# EAGLE board LilyPad-Simblee-Panel-v12 (EAGLE 7.5.0), part 1 of 2
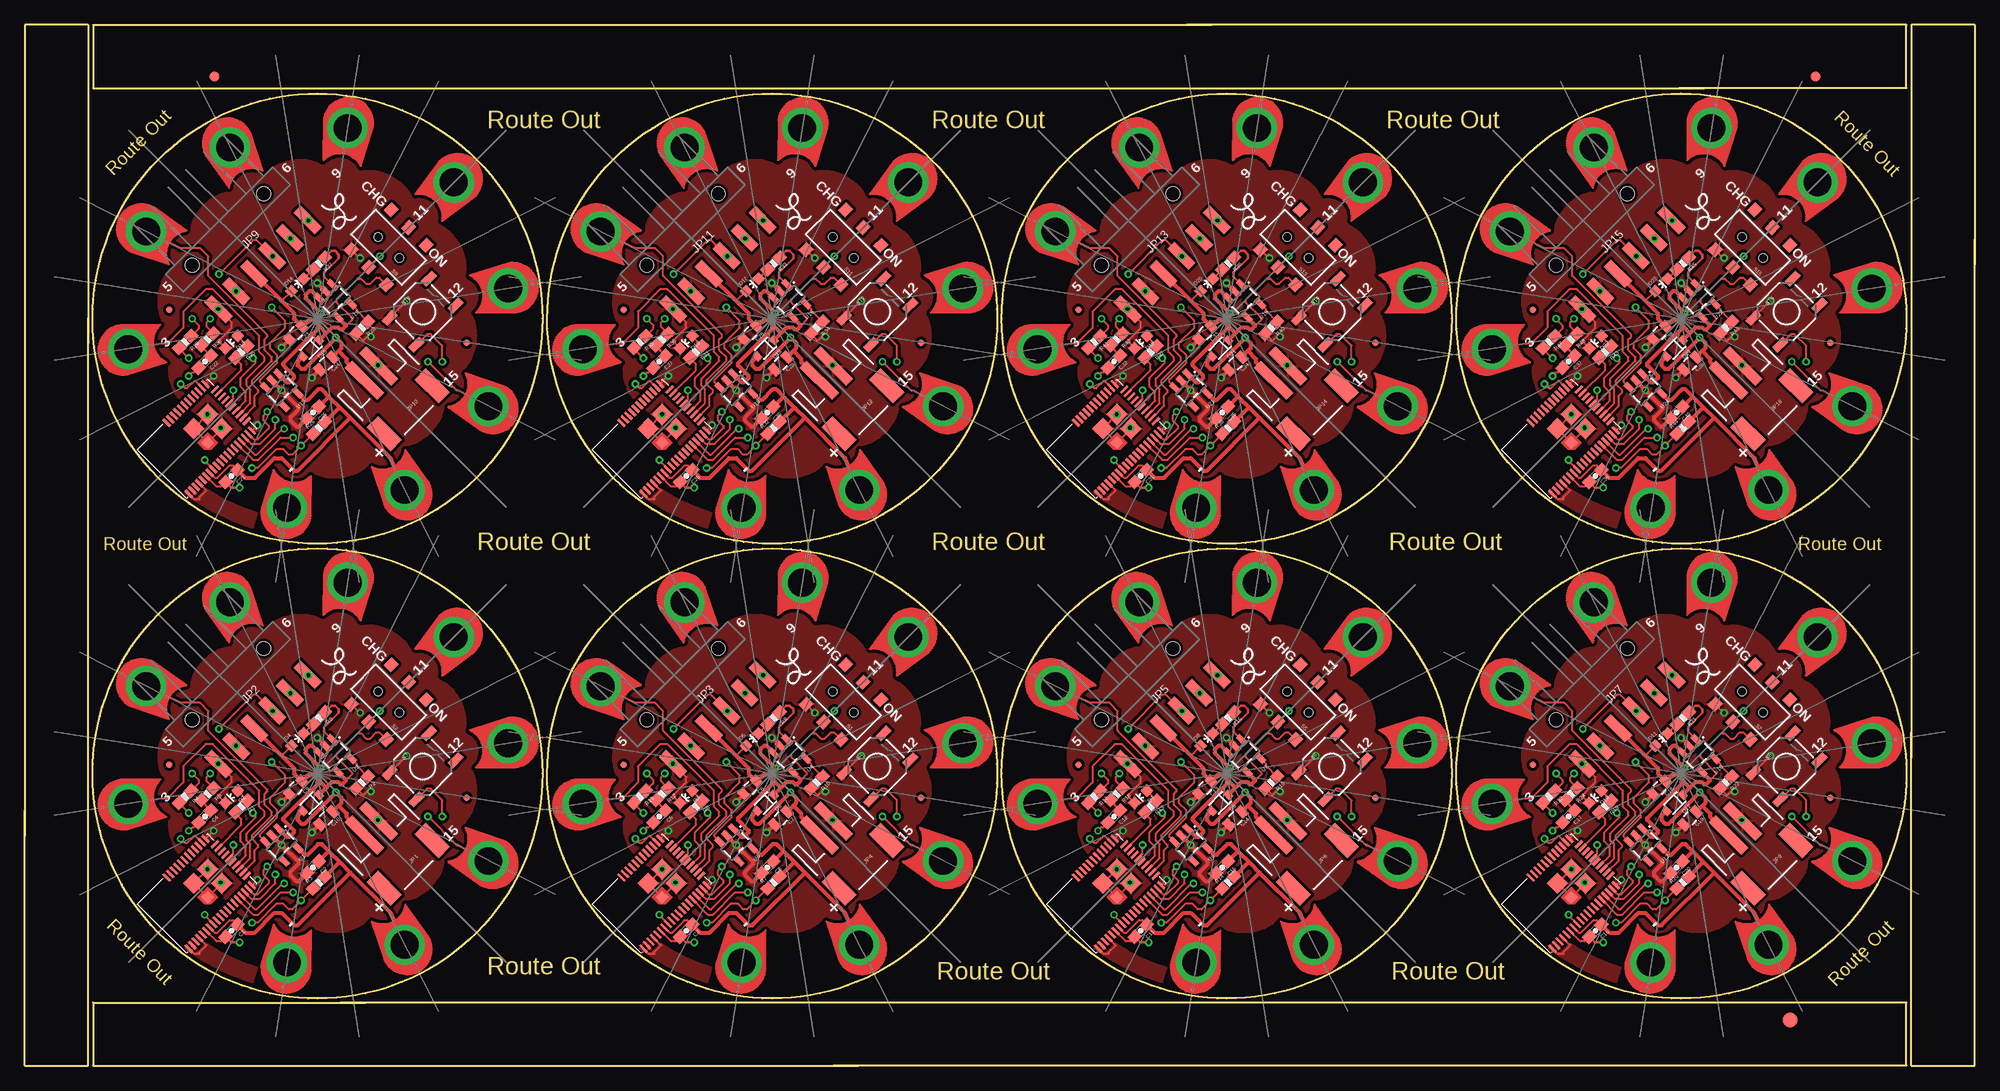
[diagram p0: board, top side]
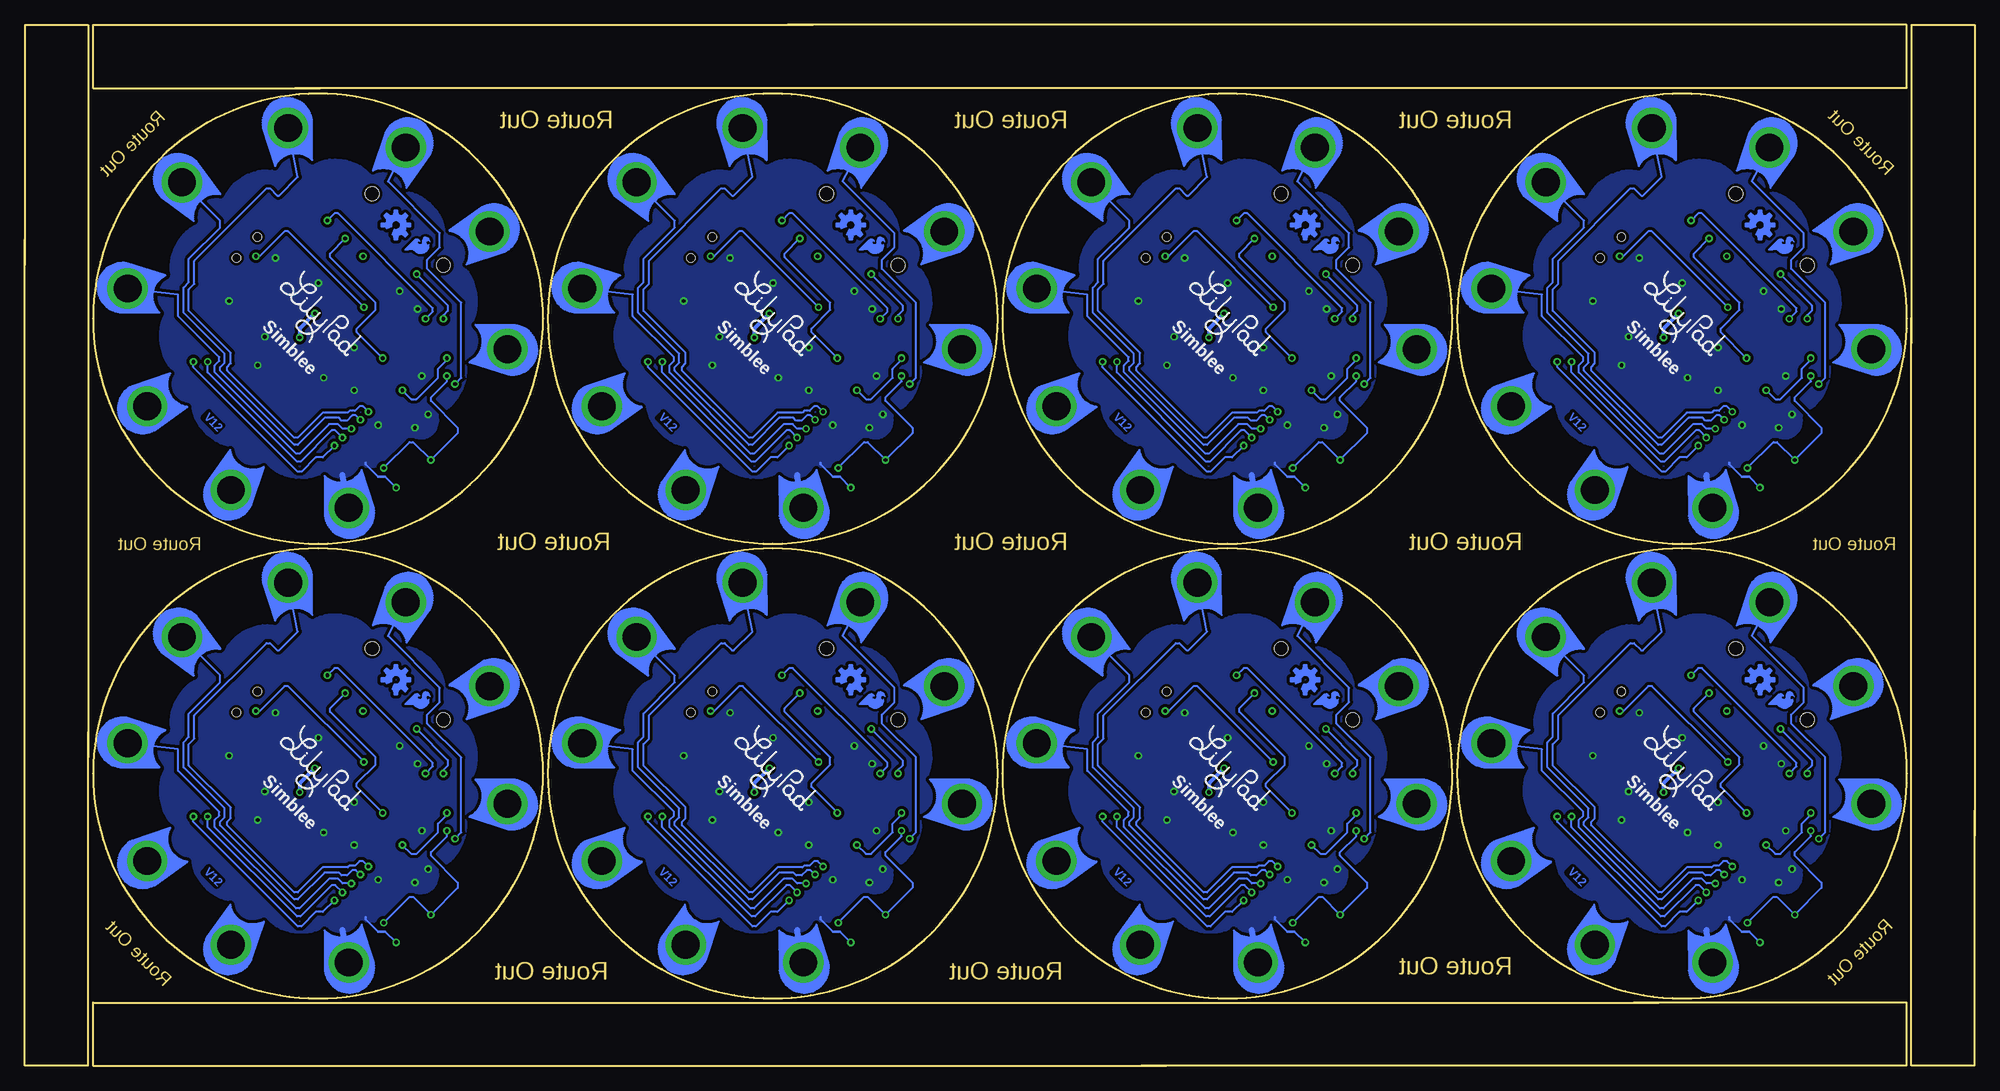
[diagram p1: board, bottom side, seen from below]

Size 196.09 x 104.65 mm. Coordinates in mm from the lower left corner, seen from the top.
Outline: 1176 segments
Copper layers (1*16): Top 0.035mm / dielectric 1.5mm / Bottom 0.035mm
Design rules "SparkFun-2-layer-TIGHT": minimum track width 7mil, minimum drill 15mil, track to track 7mil, track to pad 7mil, pad to pad 7mil, via to via 7mil, smd to smd 7mil, copper to edge 7mil, drill to drill 7mil, minimum pad ring 7mil, minimum via ring 7mil, stop-mask expansion 4mil, vias tented up to drill 20mil, thermal gap 10mil
Net classes: 0 Default: width 0.203 mm; 1 VCC: width 0.254 mm
tRestrict: area 16.4,11.7 to 16.9,12.2; area 16.9,11.3 to 17.3,11.7; area 17.3,11.7 to 18,12.4; area 13.3,6.6 to 52.2,45.5; area 6.6,13.3 to 45.5,52.2; area 62.1,11.7 to 62.6,12.2; area 62.6,11.3 to 63,11.7; area 63,11.7 to 63.7,12.4; area 59,6.6 to 97.9,45.5; area 52.3,13.3 to 91.2,52.2; area 107.8,11.7 to 108.4,12.2; area 108.4,11.3 to 108.7,11.7; 28 more areas
bRestrict: area 6.6,13.3 to 45.5,52.2; area 13.3,6.6 to 52.2,45.5; area 52.3,13.3 to 91.2,52.2; area 59,6.6 to 97.9,45.5; area 98.1,13.3 to 137,52.2; area 104.7,6.6 to 143.6,45.5; area 143.8,13.3 to 182.7,52.2; area 150.5,6.6 to 189.4,45.5; area 6.6,59 to 45.5,97.9; area 13.3,52.3 to 52.2,91.2; area 52.3,59 to 91.2,97.9; area 59,52.3 to 97.9,91.2; 4 more areas

## Footprints (pad centres in the part's own frame; a part is rotated, then mirrored left to right if it is on the bottom)
PETAL-LONG-1-2SIDE = drill 2.794 pad 4.064: 1 0.03,0
0603-CAP = smd 1.1 x 1: 1 -0.85,0; 2 0.85,0
0805 = smd 0.8 x 1.2: 1 -0.9,0; 2 0.9,0
SOD-323 = smd 0.63 x 0.83: A 1.15,0; C -1.15,0
LED-0603 = smd 1 x 1: A 0,-0.877; C 0,0.877
FIDUCIAL-1.5X3 = smd 1.5 x 1.5: 1 0,0
FIDUCIAL-1X2 = smd 1 x 1: 1 0,0
MICRO-FIDUCIAL = smd 0.635 x 0.635: 1 0,0
JST-2-SMD = smd 1 x 4.6: 1 -1,-3.7; 2 1,-3.7 | smd 1.6 x 3.4: NC1 -3.4,1.5; NC2 3.4,1.5
1X06-SMD = smd 1 x 3: 1 -6.35,5; 2 -3.81,5; 3 -1.27,5; 4 1.27,5; 5 3.81,5; 6 6.35,5 | hole 1.4: -5.08,0; 5.08,0
0603-RES = smd 1.1 x 1: 1 -0.85,0; 2 0.85,0
AYZ0202 = smd 1 x 1.15: 1 -2.5,2.825; 2 0,2.825; 3 2.5,2.825; 4 -2.5,-2.825; 5 0,-2.825; 6 2.5,-2.825 | hole 0.85: 1.5,0; -1.5,0
TACTILE-SWITCH-SMD = smd 1.524 x 0.762: 1 -2.794,1.905; 2 2.794,1.905; 3 -2.794,-1.905; 4 2.794,-1.905
SOT23-5 = smd 0.55 x 1.2: 1 -0.95,-1.3; 2 0,-1.3; 3 0.95,-1.3; 4 0.95,1.3; 5 -0.95,1.3
RFD77101 = smd 1 x 0.254: 1 0,0; 2 0,-0.5; 3 0,-1; 4 0,-1.5; 5 0,-2; 6 0,-2.5; 7 0,-3; 8 0,-3.5; 9 0,-4; 10 0,-4.5; 11 0,-5; 12 0,-5.5; 13 0,-6; 14 0,-6.5; 15 0,-7; 16 0,-7.5; 17 0,-8; 18 0,-8.5; 19 0,-9; 30 6.61,-9; 31 6.61,-8.5; 32 6.61,-8; 33 6.61,-7.5; 34 6.61,-7; 35 6.61,-6.5; 36 6.61,-6; 37 6.61,-5.5; 38 6.61,-5; 39 6.61,-4.5; 40 6.61,-4; 41 6.61,-3.5 | smd 0.254 x 1: 20 1.055,-9.29; 21 1.555,-9.29; 22 2.055,-9.29; 23 2.555,-9.29; 24 3.055,-9.29; 25 3.555,-9.29; 26 4.055,-9.29; 27 4.555,-9.29; 28 5.055,-9.29; 29 5.555,-9.29 | smd 0.9 x 0.9: 42 2.3,-4.99 | smd 1.5 x 1.5: 43 2.3,-6.99; 44 4.3,-6.99; 45 4.3,-4.99

## Placement (x,y rotation side)
A4/1  SEWTAP9  [PETAL-LONG-1-2SIDE]  66.33,46.61 297 top
A4/2  SEWTAP9  [PETAL-LONG-1-2SIDE]  112.05,46.61 297 top
A4/3  SEWTAP9  [PETAL-LONG-1-2SIDE]  157.77,46.61 297 top
A4/4  SEWTAP9  [PETAL-LONG-1-2SIDE]  20.61,92.33 297 top
A4/5  SEWTAP9  [PETAL-LONG-1-2SIDE]  66.33,92.33 297 top
A4/6  SEWTAP9  [PETAL-LONG-1-2SIDE]  112.05,92.33 297 top
A4/7  SEWTAP9  [PETAL-LONG-1-2SIDE]  157.77,92.33 297 top
A4/18  SEWTAP9  [PETAL-LONG-1-2SIDE]  20.61,46.61 297 top
A5/1  SEWTAP9  [PETAL-LONG-1-2SIDE]  56.09,26.32 9 top
A5/2  SEWTAP9  [PETAL-LONG-1-2SIDE]  101.81,26.32 9 top
A5/3  SEWTAP9  [PETAL-LONG-1-2SIDE]  147.53,26.32 9 top
A5/4  SEWTAP9  [PETAL-LONG-1-2SIDE]  10.37,72.04 9 top
A5/5  SEWTAP9  [PETAL-LONG-1-2SIDE]  56.09,72.04 9 top
A5/6  SEWTAP9  [PETAL-LONG-1-2SIDE]  101.81,72.04 9 top
A5/7  SEWTAP9  [PETAL-LONG-1-2SIDE]  147.53,72.04 9 top
A5/19  SEWTAP9  [PETAL-LONG-1-2SIDE]  10.37,26.32 9 top
C1  0.1uF  [0603-CAP]  20.79,13.57 225 top
C2  2.2uF  [0603-CAP]  28.96,19.94 225 top
C3  0.1uF  [0603-CAP]  66.51,13.57 225 top
C4  10nF  [0603-CAP]  18.09,25.06 225 top
C5  10nF  [0603-CAP]  63.81,25.06 225 top
C6  22uF  [0805]  72.97,27.94 225 top
C7  22uF  [0805]  76.03,24.88 225 top
C8  2.2uF  [0603-CAP]  74.68,19.94 225 top
C9  22uF  [0805]  27.25,27.94 225 top
C10  22uF  [0805]  30.31,24.88 225 top
C11  0.1uF  [0603-CAP]  112.23,13.57 225 top
C12  10nF  [0603-CAP]  109.53,25.06 225 top
C13  22uF  [0805]  118.69,27.94 225 top
C14  22uF  [0805]  121.75,24.88 225 top
C15  2.2uF  [0603-CAP]  120.4,19.94 225 top
C16  0.1uF  [0603-CAP]  157.95,13.57 225 top
C17  10nF  [0603-CAP]  155.25,25.06 225 top
C18  22uF  [0805]  164.41,27.94 225 top
C19  22uF  [0805]  167.47,24.88 225 top
C20  2.2uF  [0603-CAP]  166.12,19.94 225 top
C21  0.1uF  [0603-CAP]  20.79,59.29 225 top
C22  10nF  [0603-CAP]  18.09,70.78 225 top
C23  22uF  [0805]  27.25,73.66 225 top
C24  22uF  [0805]  30.31,70.6 225 top
C25  2.2uF  [0603-CAP]  28.96,65.66 225 top
C26  0.1uF  [0603-CAP]  66.51,59.29 225 top
C27  10nF  [0603-CAP]  63.81,70.78 225 top
C28  22uF  [0805]  72.97,73.66 225 top
C29  22uF  [0805]  76.03,70.6 225 top
C30  2.2uF  [0603-CAP]  74.68,65.66 225 top
C31  0.1uF  [0603-CAP]  112.23,59.29 225 top
C32  10nF  [0603-CAP]  109.53,70.78 225 top
C33  22uF  [0805]  118.69,73.66 225 top
C34  22uF  [0805]  121.75,70.6 225 top
C35  2.2uF  [0603-CAP]  120.4,65.66 225 top
C36  0.1uF  [0603-CAP]  157.95,59.29 225 top
C37  10nF  [0603-CAP]  155.25,70.78 225 top
C38  22uF  [0805]  164.41,73.66 225 top
C39  22uF  [0805]  167.47,70.6 225 top
C40  2.2uF  [0603-CAP]  166.12,65.66 225 top
D1  BAT20JFILM  [SOD-323]  28.78,26.41 225 top
D2  BLUE  [LED-0603]  20.79,27.04 135 top
D3  BLUE  [LED-0603]  66.51,27.04 135 top
D4  RED  [LED-0603]  27.43,32.78 315 top
D5  RED  [LED-0603]  73.15,32.78 315 top
D6  BAT20JFILM  [SOD-323]  74.5,26.41 225 top
D7  BLUE  [LED-0603]  112.23,27.04 135 top
D8  RED  [LED-0603]  118.87,32.78 315 top
D9  BAT20JFILM  [SOD-323]  120.22,26.41 225 top
D10  BLUE  [LED-0603]  157.95,27.04 135 top
D11  RED  [LED-0603]  164.59,32.78 315 top
D12  BAT20JFILM  [SOD-323]  165.94,26.41 225 top
D13  BLUE  [LED-0603]  20.79,72.76 135 top
D14  RED  [LED-0603]  27.43,78.5 315 top
D15  BAT20JFILM  [SOD-323]  28.78,72.13 225 top
D16  BLUE  [LED-0603]  66.51,72.76 135 top
D17  RED  [LED-0603]  73.15,78.5 315 top
D18  BAT20JFILM  [SOD-323]  74.5,72.13 225 top
D19  BLUE  [LED-0603]  112.23,72.76 135 top
D20  RED  [LED-0603]  118.87,78.5 315 top
D21  BAT20JFILM  [SOD-323]  120.22,72.13 225 top
D22  BLUE  [LED-0603]  157.95,72.76 135 top
D23  RED  [LED-0603]  164.59,78.5 315 top
D24  BAT20JFILM  [SOD-323]  165.94,72.13 225 top
E$1  [FIDUCIAL-1.5X3]  177.55,4.57 0 top
E$7  [FIDUCIAL-1X2]  180.09,99.44 90 top
E$8  [FIDUCIAL-1X2]  19.05,99.44 270 top
FID1  FIDUCIALUFIDUCIAL  [MICRO-FIDUCIAL]  14.5,30.27 45 top
FID2  FIDUCIALUFIDUCIAL  [MICRO-FIDUCIAL]  44.4,26.95 45 top
FID3  FIDUCIALUFIDUCIAL  [MICRO-FIDUCIAL]  60.22,30.27 45 top
FID4  FIDUCIALUFIDUCIAL  [MICRO-FIDUCIAL]  90.12,26.95 45 top
FID5  FIDUCIALUFIDUCIAL  [MICRO-FIDUCIAL]  105.94,30.27 45 top
FID6  FIDUCIALUFIDUCIAL  [MICRO-FIDUCIAL]  135.84,26.95 45 top
FID7  FIDUCIALUFIDUCIAL  [MICRO-FIDUCIAL]  151.66,30.27 45 top
FID8  FIDUCIALUFIDUCIAL  [MICRO-FIDUCIAL]  181.56,26.95 45 top
FID9  FIDUCIALUFIDUCIAL  [MICRO-FIDUCIAL]  14.5,75.99 45 top
FID10  FIDUCIALUFIDUCIAL  [MICRO-FIDUCIAL]  44.4,72.67 45 top
FID11  FIDUCIALUFIDUCIAL  [MICRO-FIDUCIAL]  60.22,75.99 45 top
FID12  FIDUCIALUFIDUCIAL  [MICRO-FIDUCIAL]  90.12,72.67 45 top
FID13  FIDUCIALUFIDUCIAL  [MICRO-FIDUCIAL]  105.94,75.99 45 top
FID14  FIDUCIALUFIDUCIAL  [MICRO-FIDUCIAL]  135.84,72.67 45 top
FID15  FIDUCIALUFIDUCIAL  [MICRO-FIDUCIAL]  151.66,75.99 45 top
FID16  FIDUCIALUFIDUCIAL  [MICRO-FIDUCIAL]  181.56,72.67 45 top
JP1  LiPo  [JST-2-SMD]  37.49,21.29 225 top
JP2  [1X06-SMD]  20.43,38.35 225 top
JP3  [1X06-SMD]  66.15,38.35 225 top
JP4  LiPo  [JST-2-SMD]  83.21,21.29 225 top
JP5  [1X06-SMD]  111.87,38.35 225 top
JP6  LiPo  [JST-2-SMD]  128.93,21.29 225 top
JP7  [1X06-SMD]  157.59,38.35 225 top
JP8  LiPo  [JST-2-SMD]  174.65,21.29 225 top
JP9  [1X06-SMD]  20.43,84.07 225 top
JP10  LiPo  [JST-2-SMD]  37.49,67.01 225 top
JP11  [1X06-SMD]  66.15,84.07 225 top
JP12  LiPo  [JST-2-SMD]  83.21,67.01 225 top
JP13  [1X06-SMD]  111.87,84.07 225 top
JP14  LiPo  [JST-2-SMD]  128.93,67.01 225 top
JP15  [1X06-SMD]  157.59,84.07 225 top
JP16  LiPo  [JST-2-SMD]  174.65,67.01 225 top
LOGO1  SFE_LOGO_FLAME.1COP  [SFE_LOGO_FLAME_COPPER_.1]  21.24,36.29 315 bottom
LOGO2  OSHW-LOGOS-COPPER  [OSHW-LOGO-S_COPPER]  21.59,38.8 315 bottom
LOGO3  SFE_LOGO_FLAME.1COP  [SFE_LOGO_FLAME_COPPER_.1]  66.96,36.29 315 bottom
LOGO4  OSHW-LOGOS-COPPER  [OSHW-LOGO-S_COPPER]  67.31,38.8 315 bottom
LOGO5  SFE_LOGO_FLAME.1COP  [SFE_LOGO_FLAME_COPPER_.1]  112.68,36.29 315 bottom
LOGO6  OSHW-LOGOS-COPPER  [OSHW-LOGO-S_COPPER]  113.03,38.8 315 bottom
LOGO7  SFE_LOGO_FLAME.1COP  [SFE_LOGO_FLAME_COPPER_.1]  158.4,36.29 315 bottom
LOGO8  OSHW-LOGOS-COPPER  [OSHW-LOGO-S_COPPER]  158.75,38.8 315 bottom
LOGO9  SFE_LOGO_FLAME.1COP  [SFE_LOGO_FLAME_COPPER_.1]  21.24,82.01 315 bottom
LOGO10  OSHW-LOGOS-COPPER  [OSHW-LOGO-S_COPPER]  21.59,84.52 315 bottom
LOGO11  SFE_LOGO_FLAME.1COP  [SFE_LOGO_FLAME_COPPER_.1]  66.96,82.01 315 bottom
LOGO12  OSHW-LOGOS-COPPER  [OSHW-LOGO-S_COPPER]  67.31,84.52 315 bottom
LOGO13  SFE_LOGO_FLAME.1COP  [SFE_LOGO_FLAME_COPPER_.1]  112.68,82.01 315 bottom
LOGO14  OSHW-LOGOS-COPPER  [OSHW-LOGO-S_COPPER]  113.03,84.52 315 bottom
LOGO15  SFE_LOGO_FLAME.1COP  [SFE_LOGO_FLAME_COPPER_.1]  158.4,82.01 315 bottom
LOGO16  OSHW-LOGOS-COPPER  [OSHW-LOGO-S_COPPER]  158.75,84.52 315 bottom
R1  330  [0603-RES]  21.77,26.05 225 top
R2  10K  [0603-RES]  33.9,28.47 225 top
R3  10K  [0603-RES]  29.59,18.42 45 top
R4  1K  [0603-RES]  16.12,27.04 225 top
R5  1K  [0603-RES]  18.36,27.31 225 top
R6  330  [0603-RES]  67.49,26.05 225 top
R7  10K  [0603-RES]  75.31,18.42 45 top
R8  330  [0603-RES]  75.31,34.94 225 top
R9  330  [0603-RES]  29.59,34.94 225 top
R10  10K  [0603-RES]  79.62,28.47 225 top
R11  1K  [0603-RES]  61.84,27.04 225 top
R12  1K  [0603-RES]  64.08,27.31 225 top
R13  330  [0603-RES]  113.21,26.05 225 top
R14  10K  [0603-RES]  121.03,18.42 45 top
R15  330  [0603-RES]  121.03,34.94 225 top
R16  10K  [0603-RES]  125.34,28.47 225 top
R17  1K  [0603-RES]  107.56,27.04 225 top
R18  1K  [0603-RES]  109.8,27.31 225 top
R19  330  [0603-RES]  158.93,26.05 225 top
R20  10K  [0603-RES]  166.75,18.42 45 top
R21  330  [0603-RES]  166.75,34.94 225 top
R22  10K  [0603-RES]  171.06,28.47 225 top
R23  1K  [0603-RES]  153.28,27.04 225 top
R24  1K  [0603-RES]  155.52,27.31 225 top
R25  330  [0603-RES]  21.77,71.77 225 top
R26  10K  [0603-RES]  29.59,64.14 45 top
R27  330  [0603-RES]  29.59,80.66 225 top
R28  10K  [0603-RES]  33.9,74.19 225 top
R29  1K  [0603-RES]  16.12,72.76 225 top
R30  1K  [0603-RES]  18.36,73.03 225 top
R31  330  [0603-RES]  67.49,71.77 225 top
R32  10K  [0603-RES]  75.31,64.14 45 top
R33  330  [0603-RES]  75.31,80.66 225 top
R34  10K  [0603-RES]  79.62,74.19 225 top
R35  1K  [0603-RES]  61.84,72.76 225 top
R36  1K  [0603-RES]  64.08,73.03 225 top
R37  330  [0603-RES]  113.21,71.77 225 top
R38  10K  [0603-RES]  121.03,64.14 45 top
R39  330  [0603-RES]  121.03,80.66 225 top
R40  10K  [0603-RES]  125.34,74.19 225 top
R41  1K  [0603-RES]  107.56,72.76 225 top
R42  1K  [0603-RES]  109.8,73.03 225 top
R43  330  [0603-RES]  158.93,71.77 225 top
R44  10K  [0603-RES]  166.75,64.14 45 top
R45  330  [0603-RES]  166.75,80.66 225 top
R46  10K  [0603-RES]  171.06,74.19 225 top
R47  1K  [0603-RES]  153.28,72.76 225 top
R48  1K  [0603-RES]  155.52,73.03 225 top
S1  DPDT  [AYZ0202]  82.31,36.56 135 top
S2  DPDT  [AYZ0202]  36.59,36.56 135 top
S3  Reset  [TACTILE-SWITCH-SMD]  40,30.09 45 top
S4  Reset  [TACTILE-SWITCH-SMD]  85.72,30.09 45 top
S5  DPDT  [AYZ0202]  128.03,36.56 135 top
S6  Reset  [TACTILE-SWITCH-SMD]  131.44,30.09 45 top
S7  DPDT  [AYZ0202]  173.75,36.56 135 top
S8  Reset  [TACTILE-SWITCH-SMD]  177.16,30.09 45 top
S9  DPDT  [AYZ0202]  36.59,82.28 135 top
S10  Reset  [TACTILE-SWITCH-SMD]  40,75.81 45 top
S11  DPDT  [AYZ0202]  82.31,82.28 135 top
S12  Reset  [TACTILE-SWITCH-SMD]  85.72,75.81 45 top
S13  DPDT  [AYZ0202]  128.03,82.28 135 top
S14  Reset  [TACTILE-SWITCH-SMD]  131.44,75.81 45 top
S15  DPDT  [AYZ0202]  173.75,82.28 135 top
S16  Reset  [TACTILE-SWITCH-SMD]  177.16,75.81 45 top
U1  MIC5219 3.3V  [SOT23-5]  25.82,22.19 225 top
U2  MCP73831  [SOT23-5]  31.2,31.17 225 top
U3  RFD77101  [RFD77101]  16.48,11.77 135 top
U4  MCP73831  [SOT23-5]  76.92,31.17 225 top
U5  RFD77101  [RFD77101]  62.2,11.77 135 top
U6  MIC5219 3.3V  [SOT23-5]  71.54,22.19 225 top
U7  MCP73831  [SOT23-5]  122.64,31.17 225 top
U8  RFD77101  [RFD77101]  107.92,11.77 135 top
U9  MIC5219 3.3V  [SOT23-5]  117.26,22.19 225 top
U10  MCP73831  [SOT23-5]  168.36,31.17 225 top
U11  RFD77101  [RFD77101]  153.64,11.77 135 top
U12  MIC5219 3.3V  [SOT23-5]  162.98,22.19 225 top
U13  MCP73831  [SOT23-5]  31.2,76.89 225 top
U14  RFD77101  [RFD77101]  16.48,57.49 135 top
U15  MIC5219 3.3V  [SOT23-5]  25.82,67.91 225 top
U16  MCP73831  [SOT23-5]  76.92,76.89 225 top
U17  RFD77101  [RFD77101]  62.2,57.49 135 top
U18  MIC5219 3.3V  [SOT23-5]  71.54,67.91 225 top
U19  MCP73831  [SOT23-5]  122.64,76.89 225 top
U20  RFD77101  [RFD77101]  107.92,57.49 135 top
U21  MIC5219 3.3V  [SOT23-5]  117.26,67.91 225 top
U22  MCP73831  [SOT23-5]  168.36,76.89 225 top
U23  RFD77101  [RFD77101]  153.64,57.49 135 top
U24  MIC5219 3.3V  [SOT23-5]  162.98,67.91 225 top
U$1  LOGO-LPL  [LOGO-L]  31.56,40.15 45 top
U$2  LOGO-LPLP  [LOGO-LILYPAD]  29.23,29.73 315 bottom
U$3  SEWTAP9  [PETAL-LONG-1-2SIDE]  92.37,20.57 153 top
U$4  SEWTAP9  [PETAL-LONG-1-2SIDE]  32.46,48.59 261 top
U$5  SEWTAP9  [PETAL-LONG-1-2SIDE]  94.35,32.43 189 top
U$6  SEWTAP9  [PETAL-LONG-1-2SIDE]  57.89,38.17 333 top
U$7  SEWTAP9  [PETAL-LONG-1-2SIDE]  72.07,10.33 81 top
U$8  SEWTAP9  [PETAL-LONG-1-2SIDE]  83.93,12.13 117 top
U$9  SEWTAP9  [PETAL-LONG-1-2SIDE]  88.87,43.11 225 top
U$10  SEWTAP9  [PETAL-LONG-1-2SIDE]  78.18,48.59 261 top
U$11  LOGO-LPL  [LOGO-L]  77.28,40.15 45 top
U$12  LOGO-LPLP  [LOGO-LILYPAD]  74.95,29.73 315 bottom
U$13  SEWTAP9  [PETAL-LONG-1-2SIDE]  138.09,20.57 153 top
U$14  SEWTAP9  [PETAL-LONG-1-2SIDE]  140.07,32.43 189 top
U$15  SEWTAP9  [PETAL-LONG-1-2SIDE]  103.61,38.17 333 top
U$16  SEWTAP9  [PETAL-LONG-1-2SIDE]  117.79,10.33 81 top
U$17  SEWTAP9  [PETAL-LONG-1-2SIDE]  129.65,12.13 117 top
U$18  SEWTAP9  [PETAL-LONG-1-2SIDE]  134.59,43.11 225 top
U$19  SEWTAP9  [PETAL-LONG-1-2SIDE]  123.9,48.59 261 top
U$20  LOGO-LPL  [LOGO-L]  123,40.15 45 top
U$21  LOGO-LPLP  [LOGO-LILYPAD]  120.67,29.73 315 bottom
U$22  SEWTAP9  [PETAL-LONG-1-2SIDE]  183.81,20.57 153 top
U$23  SEWTAP9  [PETAL-LONG-1-2SIDE]  185.79,32.43 189 top
U$24  SEWTAP9  [PETAL-LONG-1-2SIDE]  149.33,38.17 333 top
U$25  SEWTAP9  [PETAL-LONG-1-2SIDE]  163.51,10.33 81 top
U$26  SEWTAP9  [PETAL-LONG-1-2SIDE]  175.37,12.13 117 top
U$27  SEWTAP9  [PETAL-LONG-1-2SIDE]  180.31,43.11 225 top
U$28  SEWTAP9  [PETAL-LONG-1-2SIDE]  169.62,48.59 261 top
U$29  LOGO-LPL  [LOGO-L]  168.72,40.15 45 top
U$30  LOGO-LPLP  [LOGO-LILYPAD]  166.39,29.73 315 bottom
U$31  SEWTAP9  [PETAL-LONG-1-2SIDE]  46.65,66.29 153 top
U$32  SEWTAP9  [PETAL-LONG-1-2SIDE]  48.63,78.15 189 top
U$33  SEWTAP9  [PETAL-LONG-1-2SIDE]  12.17,83.89 333 top
U$34  SEWTAP9  [PETAL-LONG-1-2SIDE]  26.35,56.05 81 top
U$35  SEWTAP9  [PETAL-LONG-1-2SIDE]  46.65,20.57 153 top
U$36  SEWTAP9  [PETAL-LONG-1-2SIDE]  38.21,57.85 117 top
U$37  SEWTAP9  [PETAL-LONG-1-2SIDE]  48.63,32.43 189 top
U$38  SEWTAP9  [PETAL-LONG-1-2SIDE]  43.15,88.83 225 top
U$39  SEWTAP9  [PETAL-LONG-1-2SIDE]  12.17,38.17 333 top
U$40  SEWTAP9  [PETAL-LONG-1-2SIDE]  32.46,94.31 261 top
U$41  SEWTAP9  [PETAL-LONG-1-2SIDE]  26.35,10.33 81 top
U$42  LOGO-LPL  [LOGO-L]  31.56,85.87 45 top
U$43  SEWTAP9  [PETAL-LONG-1-2SIDE]  38.21,12.13 117 top
U$44  LOGO-LPLP  [LOGO-LILYPAD]  29.23,75.45 315 bottom
U$45  SEWTAP9  [PETAL-LONG-1-2SIDE]  43.15,43.11 225 top
U$46  SEWTAP9  [PETAL-LONG-1-2SIDE]  92.37,66.29 153 top
U$47  SEWTAP9  [PETAL-LONG-1-2SIDE]  94.35,78.15 189 top
U$48  SEWTAP9  [PETAL-LONG-1-2SIDE]  57.89,83.89 333 top
U$49  SEWTAP9  [PETAL-LONG-1-2SIDE]  72.07,56.05 81 top
U$50  SEWTAP9  [PETAL-LONG-1-2SIDE]  83.93,57.85 117 top
U$51  SEWTAP9  [PETAL-LONG-1-2SIDE]  88.87,88.83 225 top
U$52  SEWTAP9  [PETAL-LONG-1-2SIDE]  78.18,94.31 261 top
U$53  LOGO-LPL  [LOGO-L]  77.28,85.87 45 top
U$54  LOGO-LPLP  [LOGO-LILYPAD]  74.95,75.45 315 bottom
U$55  SEWTAP9  [PETAL-LONG-1-2SIDE]  138.09,66.29 153 top
U$56  SEWTAP9  [PETAL-LONG-1-2SIDE]  140.07,78.15 189 top
U$57  SEWTAP9  [PETAL-LONG-1-2SIDE]  103.61,83.89 333 top
U$58  SEWTAP9  [PETAL-LONG-1-2SIDE]  117.79,56.05 81 top
U$59  SEWTAP9  [PETAL-LONG-1-2SIDE]  129.65,57.85 117 top
U$60  SEWTAP9  [PETAL-LONG-1-2SIDE]  134.59,88.83 225 top
U$61  SEWTAP9  [PETAL-LONG-1-2SIDE]  123.9,94.31 261 top
U$62  LOGO-LPL  [LOGO-L]  123,85.87 45 top
U$63  LOGO-LPLP  [LOGO-LILYPAD]  120.67,75.45 315 bottom
U$64  SEWTAP9  [PETAL-LONG-1-2SIDE]  183.81,66.29 153 top
U$65  SEWTAP9  [PETAL-LONG-1-2SIDE]  185.79,78.15 189 top
U$66  SEWTAP9  [PETAL-LONG-1-2SIDE]  149.33,83.89 333 top
U$67  SEWTAP9  [PETAL-LONG-1-2SIDE]  163.51,56.05 81 top
U$68  SEWTAP9  [PETAL-LONG-1-2SIDE]  175.37,57.85 117 top
U$69  SEWTAP9  [PETAL-LONG-1-2SIDE]  180.31,88.83 225 top
U$70  SEWTAP9  [PETAL-LONG-1-2SIDE]  169.62,94.31 261 top
U$71  LOGO-LPL  [LOGO-L]  168.72,85.87 45 top
U$72  LOGO-LPLP  [LOGO-LILYPAD]  166.39,75.45 315 bottom

## Library data of the parts
A4/1-A4/7 A4/18 A5/1-A5/7 A5/19 U$1-U$72 = LilyPad-Wearables
C1 C3 C11 C16 C21 C26 C31 C36 = SparkFun-Capacitors; PROD_ID: CAP-00810
C2 C8 C15 C20 C25 C30 C35 C40 = SparkFun-Capacitors; PROD_ID: CAP-07888
C4 C5 C12 C17 C22 C27 C32 C37 = SparkFun-Capacitors; PROD_ID: CAP-00867
C6 C7 C9 C10 C13 C14 C18 C19 C23 C24 C28 C29 C33 C34 C38 C39 = SparkFun-Capacitors; PROD_ID: CAP-08402
D1 D6 D9 D12 D15 D18 D21 D24 = SparkFun-DiscreteSemi; PROD_ID: DIO-11623
D2 D3 D7 D10 D13 D16 D19 D22 = SparkFun-LED; PROD_ID: DIO-08575
D4 D5 D8 D11 D14 D17 D20 D23 = SparkFun-LED; PROD_ID: DIO-00819
E$1 = SparkFun-Retired
E$7 E$8 FID1-FID16 LOGO1-LOGO16 = SparkFun-Aesthetics
JP1 JP4 JP6 JP8 JP10 JP12 JP14 JP16 = SparkFun-Connectors; PROD_ID: CONN-11443
JP2 JP3 JP5 JP7 JP9 JP11 JP13 JP15 = SparkFun-Connectors; PROD_ID: CONN-08971
R1 R6 R8 R9 R13 R15 R19 R21 R25 R27 R31 R33 R37 R39 R43 R45 = SparkFun-Resistors; PROD_ID: RES-00818
R2 R3 R7 R10 R14 R16 R20 R22 R26 R28 R32 R34 R38 R40 R44 R46 = SparkFun-Resistors; PROD_ID: RES-00824
R4 R5 R11 R12 R17 R18 R23 R24 R29 R30 R35 R36 R41 R42 R47 R48 = SparkFun-Resistors; PROD_ID: RES-07856
S1 S2 S5 S7 S9 S11 S13 S15 = SparkFun-Electromechanical; PROD_ID: SWCH-08179
S3 S4 S6 S8 S10 S12 S14 S16 = SparkFun-Electromechanical; PROD_ID: SWCH-08247
U1 U6 U9 U12 U15 U18 U21 U24 = SparkFun-PowerIC; PROD_ID: VREG-09872
U2 U4 U7 U10 U13 U16 U19 U22 = SparkFun-PowerIC; PROD_ID: IC-09995
U3 U5 U8 U11 U14 U17 U20 U23 = RFDigital; PROD_ID: COMP-13017

## Nets
3.3V: C1.1 C2.1 R3.2 U1.5 U3.7 U$43.1
3.3V1: C3.1 C8.1 R7.2 U5.7 U6.5 U$8.1
3.3V2: C11.1 C15.1 R14.2 U8.7 U9.5 U$17.1
3.3V3: C16.1 C20.1 R20.2 U11.7 U12.5 U$26.1
3.3V4: C21.1 C25.1 R26.2 U14.7 U15.5 U$36.1
3.3V5: C26.1 C30.1 R32.2 U17.7 U18.5 U$50.1
3.3V6: C31.1 C35.1 R38.2 U20.7 U21.5 U$59.1
3.3V7: C36.1 C40.1 R44.2 U23.7 U24.5 U$68.1
5V: C9.1 D1.C D4.A JP2.4 S2.1 U1.1 U2.4
5V1: C6.1 D5.A D6.C JP3.4 S1.1 U4.4 U6.1
5V2: C13.1 D8.A D9.C JP5.4 S5.1 U7.4 U9.1
5V3: C18.1 D11.A D12.C JP7.4 S7.1 U10.4 U12.1
5V4: C23.1 D14.A D15.C JP9.4 S9.1 U13.4 U15.1
5V5: C28.1 D17.A D18.C JP11.4 S11.1 U16.4 U18.1
5V6: C33.1 D20.A D21.C JP13.4 S13.1 U19.4 U21.1
5V7: C38.1 D23.A D24.C JP15.4 S15.1 U22.4 U24.1
D1: A5/1.1 U5.22
D2: U5.21 U$6.1
D3: A5/19.1 U3.22
D4: U5.18 U$10.1
D5: U3.21 U$39.1
D6: A4/18.1 U3.31
D7: U5.17 U$9.1
D8: U5.16 U$5.1
D9: U3.18 U$4.1
D10: U5.15 U$3.1
D11: U3.17 U$45.1
D12: U3.16 U$37.1
D13: A4/1.1 U5.31
D14: A5/2.1 U8.22
D15: U3.15 U$35.1
D16: U8.21 U$15.1
D17: U8.18 U$19.1
D18: U8.17 U$18.1
D19: U8.16 U$14.1
D20: U8.15 U$13.1
D21: A4/2.1 U8.31
D22: A5/3.1 U11.22
D23: U11.21 U$24.1
D24: U11.18 U$28.1
D25: U11.17 U$27.1
D26: U11.16 U$23.1
D27: U11.15 U$22.1
D28: A4/3.1 U11.31
D29: A5/4.1 U14.22
D30: U14.21 U$33.1
D31: U14.18 U$40.1
D32: U14.17 U$38.1
D33: U14.16 U$32.1
D34: U14.15 U$31.1
D35: A4/4.1 U14.31
D36: A5/5.1 U17.22
D37: U17.21 U$48.1
D38: U17.18 U$52.1
D39: U17.17 U$51.1
D40: U17.16 U$47.1
D41: U17.15 U$46.1
D42: A4/5.1 U17.31
D43: A5/6.1 U20.22
D44: U20.21 U$57.1
D45: U20.18 U$61.1
D46: U20.17 U$60.1
D47: U20.16 U$56.1
D48: U20.15 U$55.1
D49: A4/6.1 U20.31
D50: A5/7.1 U23.22
D51: U23.21 U$66.1
D52: U23.18 U$70.1
D53: U23.17 U$69.1
D54: U23.16 U$65.1
D55: U23.15 U$64.1
D56: A4/7.1 U23.31
DTR: JP2.1 R5.1
DTR1: JP3.1 R12.1
DTR2: JP5.1 R18.1
DTR3: JP7.1 R24.1
DTR4: JP9.1 R30.1
DTR5: JP11.1 R36.1
DTR6: JP13.1 R42.1
DTR7: JP15.1 R48.1
GND: C1.2 C2.2 C9.2 C10.2 D2.C JP1.1 JP2.5 JP2.6 R2.2 S2.3 S3.1 U1.2 U2.2 U3.6 U3.19 U3.30 U3.42 U3.43 U3.44 U3.45 U$41.1
GND1: C3.2 C6.2 C7.2 C8.2 D3.C JP3.5 JP3.6 JP4.1 R10.2 S1.3 S4.1 U4.2 U5.6 U5.19 U5.30 U5.42 U5.43 U5.44 U5.45 U6.2 U$7.1
GND2: C11.2 C13.2 C14.2 C15.2 D7.C JP5.5 JP5.6 JP6.1 R16.2 S5.3 S6.1 U7.2 U8.6 U8.19 U8.30 U8.42 U8.43 U8.44 U8.45 U9.2 U$16.1
GND3: C16.2 C18.2 C19.2 C20.2 D10.C JP7.5 JP7.6 JP8.1 R22.2 S7.3 S8.1 U10.2 U11.6 U11.19 U11.30 U11.42 U11.43 U11.44 U11.45 U12.2 U$25.1
GND4: C21.2 C23.2 C24.2 C25.2 D13.C JP9.5 JP9.6 JP10.1 R28.2 S9.3 S10.1 U13.2 U14.6 U14.19 U14.30 U14.42 U14.43 U14.44 U14.45 U15.2 U$34.1
GND5: C26.2 C28.2 C29.2 C30.2 D16.C JP11.5 JP11.6 JP12.1 R34.2 S11.3 S12.1 U16.2 U17.6 U17.19 U17.30 U17.42 U17.43 U17.44 U17.45 U18.2 U$49.1
GND6: C31.2 C33.2 C34.2 C35.2 D19.C JP13.5 JP13.6 JP14.1 R40.2 S13.3 S14.1 U19.2 U20.6 U20.19 U20.30 U20.42 U20.43 U20.44 U20.45 U21.2 U$58.1
GND7: C36.2 C38.2 C39.2 C40.2 D22.C JP15.5 JP15.6 JP16.1 R46.2 S15.3 S16.1 U22.2 U23.6 U23.19 U23.30 U23.42 U23.43 U23.44 U23.45 U24.2 U$67.1
ISO_PAD: U3.1 U3.2 U3.4
ISO_PAD1: U5.1 U5.2 U5.4
ISO_PAD2: U8.1 U8.2 U8.4
ISO_PAD3: U11.1 U11.2 U11.4
ISO_PAD4: U14.1 U14.2 U14.4
ISO_PAD5: U17.1 U17.2 U17.4
ISO_PAD6: U20.1 U20.2 U20.4
ISO_PAD7: U23.1 U23.2 U23.4
LV_DTR: C4.1 R5.2
LV_DTR1: C5.1 R12.2
LV_DTR2: C12.1 R18.2
LV_DTR3: C17.1 R24.2
LV_DTR4: C22.1 R30.2
LV_DTR5: C27.1 R36.2
LV_DTR6: C32.1 R42.2
LV_DTR7: C37.1 R48.2
LV_RXI: R4.2 U3.25
LV_RXI1: R11.2 U5.25
LV_RXI2: R17.2 U8.25
LV_RXI3: R23.2 U11.25
LV_RXI4: R29.2 U14.25
LV_RXI5: R35.2 U17.25
LV_RXI6: R41.2 U20.25
LV_RXI7: R47.2 U23.25
N$1: R1.2 U3.28
N$2: D2.A R1.1
N$3: S2.2 U1.3
N$4: D3.A R6.1
N$5: D5.C R8.2
N$6: R6.2 U5.28
N$7: S1.2 U6.3
N$8: D4.C R9.2
N$9: D7.A R13.1
N$10: D8.C R15.2
N$11: R13.2 U8.28
N$12: S5.2 U9.3
N$13: D10.A R19.1
N$14: D11.C R21.2
N$15: R19.2 U11.28
N$16: S7.2 U12.3
N$17: D13.A R25.1
N$18: D14.C R27.2
N$19: R25.2 U14.28
N$20: S9.2 U15.3
N$21: D16.A R31.1
N$22: D17.C R33.2
N$23: R31.2 U17.28
N$24: S11.2 U18.3
N$25: D19.A R37.1
N$26: D20.C R39.2
N$27: R37.2 U20.28
N$28: S13.2 U21.3
N$29: D22.A R43.1
N$30: D23.C R45.2
N$31: R43.2 U23.28
N$32: S15.2 U24.3
PROG: R2.1 U2.5
PROG1: R10.1 U4.5
PROG2: R16.1 U7.5
PROG3: R22.1 U10.5
PROG4: R28.1 U13.5
PROG5: R34.1 U16.5
PROG6: R40.1 U19.5
PROG7: R46.1 U22.5
RST: C4.2 R3.1 S3.3 U3.8
RST1: C5.2 R7.1 S4.3 U5.8
RST2: C12.2 R14.1 S6.3 U8.8
RST3: C17.2 R20.1 S8.3 U11.8
RST4: C22.2 R26.1 S10.3 U14.8
RST5: C27.2 R32.1 S12.3 U17.8
RST6: C32.2 R38.1 S14.3 U20.8
RST7: C37.2 R44.1 S16.3 U23.8
RXI: JP2.3 R4.1
RXI1: JP3.3 R11.1
RXI2: JP5.3 R17.1
RXI3: JP7.3 R23.1
RXI4: JP9.3 R29.1
RXI5: JP11.3 R35.1
RXI6: JP13.3 R41.1
RXI7: JP15.3 R47.1
STAT: R9.1 U2.1
STAT1: R8.1 U4.1
STAT2: R15.1 U7.1
STAT3: R21.1 U10.1
STAT4: R27.1 U13.1
STAT5: R33.1 U16.1
STAT6: R39.1 U19.1
STAT7: R45.1 U22.1
TXO: JP2.2 U3.23
TXO1: JP3.2 U5.23
TXO2: JP5.2 U8.23
TXO3: JP7.2 U11.23
TXO4: JP9.2 U14.23
TXO5: JP11.2 U17.23
TXO6: JP13.2 U20.23
TXO7: JP15.2 U23.23
V_BATT: C10.1 D1.A JP1.2 U2.3
V_BATT1: C7.1 D6.A JP4.2 U4.3
V_BATT2: C14.1 D9.A JP6.2 U7.3
V_BATT3: C19.1 D12.A JP8.2 U10.3
V_BATT4: C24.1 D15.A JP10.2 U13.3
V_BATT5: C29.1 D18.A JP12.2 U16.3
V_BATT6: C34.1 D21.A JP14.2 U19.3
V_BATT7: C39.1 D24.A JP16.2 U22.3

## Tracks (layer width: path | path; a pad name or v marks a point on that pad's centre or on a via)
3.3V
  Top 0.203: U3.7 19.1,13.39 19.35,13.39 20.61,14.64 20.91,14.64 C1.1
  Top 0.406: U$43.1 36.77,15.36 32.73,19.4 | R3.2 31.56,20.39 31.74,20.39 | 32.73,19.4 27.43,14.11 27.07,14.11 25.82,15.36 25.1,15.36 23.12,13.39 22.17,13.39 C1.1 | C2.1 30.57,21.56 | 30.57,21.56 29.86,22.28 29.5,22.28 28.42,21.2 28.15,21.2 U1.5 | 30.57,21.56 31.74,20.39 | 31.74,20.39 32.73,19.4
3.3V1
  Top 0.203: U5.7 64.82,13.39 65.07,13.39 66.33,14.64 66.63,14.64 C3.1
  Top 0.406: U$8.1 82.49,15.36 78.45,19.4 | R7.2 77.28,20.39 77.46,20.39 | 78.45,19.4 73.15,14.11 72.79,14.11 71.53,15.36 70.82,15.36 68.84,13.39 67.89,13.39 C3.1 | C8.1 76.3,21.56 | 76.3,21.56 75.58,22.28 75.22,22.28 74.14,21.2 73.87,21.2 U6.5 | 76.3,21.56 77.46,20.39 | 77.46,20.39 78.45,19.4
3.3V2
  Top 0.203: U8.7 110.54,13.39 110.79,13.39 112.05,14.64 112.35,14.64 C11.1
  Top 0.406: U$17.1 128.21,15.36 124.17,19.4 | R14.2 123,20.39 123.18,20.39 | 124.17,19.4 118.87,14.11 118.51,14.11 117.25,15.36 116.54,15.36 114.56,13.39 113.61,13.39 C11.1 | C15.1 122.02,21.56 | 122.02,21.56 121.3,22.28 120.94,22.28 119.86,21.2 119.59,21.2 U9.5 | 122.02,21.56 123.18,20.39 | 123.18,20.39 124.17,19.4
3.3V3
  Top 0.203: U11.7 156.26,13.39 156.51,13.39 157.77,14.64 158.07,14.64 C16.1
  Top 0.406: U$26.1 173.93,15.36 169.89,19.4 | R20.2 168.72,20.39 168.9,20.39 | 169.89,19.4 164.59,14.11 164.23,14.11 162.97,15.36 162.26,15.36 160.28,13.39 159.33,13.39 C16.1 | C20.1 167.74,21.56 | 167.74,21.56 167.02,22.28 166.66,22.28 165.58,21.2 165.31,21.2 U12.5 | 167.74,21.56 168.9,20.39 | 168.9,20.39 169.89,19.4
3.3V4
  Top 0.203: U14.7 19.1,59.11 19.35,59.11 20.61,60.37 20.91,60.37 C21.1
  Top 0.406: U$36.1 36.77,61.08 32.73,65.12 | R26.2 31.56,66.11 31.74,66.11 | 32.73,65.12 27.43,59.83 27.07,59.83 25.82,61.08 25.1,61.08 23.12,59.11 22.17,59.11 C21.1 | C25.1 30.57,67.28 | 30.57,67.28 29.86,68 29.5,68 28.42,66.92 28.15,66.92 U15.5 | 30.57,67.28 31.74,66.11 | 31.74,66.11 32.73,65.12
3.3V5
  Top 0.203: U17.7 64.82,59.11 65.07,59.11 66.33,60.37 66.63,60.37 C26.1
  Top 0.406: U$50.1 82.49,61.08 78.45,65.12 | R32.2 77.28,66.11 77.46,66.11 | 78.45,65.12 73.15,59.83 72.79,59.83 71.53,61.08 70.82,61.08 68.84,59.11 67.89,59.11 C26.1 | C30.1 76.3,67.28 | 76.3,67.28 75.58,68 75.22,68 74.14,66.92 73.87,66.92 U18.5 | 76.3,67.28 77.46,66.11 | 77.46,66.11 78.45,65.12
3.3V6
  Top 0.203: U20.7 110.54,59.11 110.79,59.11 112.05,60.37 112.35,60.37 C31.1
  Top 0.406: U$59.1 128.21,61.08 124.17,65.12 | R38.2 123,66.11 123.18,66.11 | 124.17,65.12 118.87,59.83 118.51,59.83 117.25,61.08 116.54,61.08 114.56,59.11 113.61,59.11 C31.1 | C35.1 122.02,67.28 | 122.02,67.28 121.3,68 120.94,68 119.86,66.92 119.59,66.92 U21.5 | 122.02,67.28 123.18,66.11 | 123.18,66.11 124.17,65.12
3.3V7
  Top 0.203: U23.7 156.26,59.11 156.51,59.11 157.77,60.37 158.07,60.37 C36.1
  Top 0.406: U$68.1 173.93,61.08 169.89,65.12 | R44.2 168.72,66.11 168.9,66.11 | 169.89,65.12 164.59,59.83 164.23,59.83 162.97,61.08 162.26,61.08 160.28,59.11 159.33,59.11 C36.1 | C40.1 167.74,67.28 | 167.74,67.28 167.02,68 166.66,68 165.58,66.92 165.31,66.92 U24.5 | 167.74,67.28 168.9,66.11 | 168.9,66.11 169.89,65.12
5V
  Top 0.203: 36.36,32.73 S2.1 35.65,33.5 35.33,33.5 34.71,32.88 34.35,32.88 33.81,33.41 33.45,33.41 31.38,31.35 31.38,30.99 32.91,29.46 32.91,29.28 32.37,28.75 32.28,28.75
  Top 0.254: D4.A 25.82,31.17
  Top 0.406: 29.68,28.56 26,24.88 26,24.7 27.07,23.62 27.07,23.45 26.62,23 26.35,23 U1.1 | JP2.4 25.82,31.17 27.07,29.91 27.07,29.37 27.87,28.57 C9.1 28.6,29.28 28.96,29.28 29.68,28.56 | D1.C 30.3,27.94 | 30.3,27.94 29.68,28.56 | U2.4 32.28,28.75 32.28,28.65 31.92,28.3 31.74,28.3 31.56,28.47 30.84,28.47 30.3,27.94
5V1
  Top 0.203: 82.08,32.73 S1.1 81.37,33.5 81.05,33.5 80.43,32.88 80.07,32.88 79.53,33.41 79.17,33.41 77.1,31.35 77.1,30.99 78.63,29.46 78.63,29.28 78.09,28.75 78,28.75
  Top 0.254: D5.A 71.53,31.17
  Top 0.406: 75.4,28.56 71.72,24.88 71.72,24.7 72.79,23.62 72.79,23.45 72.34,23 72.07,23 U6.1 | JP3.4 71.53,31.17 72.79,29.91 72.79,29.37 73.59,28.57 C6.1 74.32,29.28 74.68,29.28 75.4,28.56 | D6.C 76.03,27.94 | 76.03,27.94 75.4,28.56 | U4.4 78,28.75 78,28.65 77.64,28.3 77.46,28.3 77.28,28.47 76.56,28.47 76.03,27.94
5V2
  Top 0.203: 127.8,32.73 S5.1 127.09,33.5 126.77,33.5 126.15,32.88 125.79,32.88 125.25,33.41 124.89,33.41 122.82,31.35 122.82,30.99 124.35,29.46 124.35,29.28 123.81,28.75 123.72,28.75
  Top 0.254: D8.A 117.25,31.17
  Top 0.406: 121.12,28.56 117.44,24.88 117.44,24.7 118.51,23.62 118.51,23.45 118.06,23 117.79,23 U9.1 | JP5.4 117.25,31.17 118.51,29.91 118.51,29.37 119.31,28.57 C13.1 120.04,29.28 120.4,29.28 121.12,28.56 | D9.C 121.75,27.94 | 121.75,27.94 121.12,28.56 | U7.4 123.72,28.75 123.72,28.65 123.36,28.3 123.18,28.3 123,28.47 122.28,28.47 121.75,27.94
5V3
  Top 0.203: 173.52,32.73 S7.1 172.81,33.5 172.49,33.5 171.87,32.88 171.51,32.88 170.97,33.41 170.61,33.41 168.54,31.35 168.54,30.99 170.07,29.46 170.07,29.28 169.53,28.75 169.44,28.75
  Top 0.254: D11.A 162.97,31.17
  Top 0.406: 166.84,28.56 163.16,24.88 163.16,24.7 164.23,23.62 164.23,23.45 163.78,23 163.51,23 U12.1 | JP7.4 162.97,31.17 164.23,29.91 164.23,29.37 165.03,28.57 C18.1 165.76,29.28 166.12,29.28 166.84,28.56 | D12.C 167.47,27.94 | 167.47,27.94 166.84,28.56 | U10.4 169.44,28.75 169.44,28.65 169.08,28.3 168.9,28.3 168.72,28.47 168,28.47 167.47,27.94
5V4
  Top 0.203: 36.36,78.45 S9.1 35.65,79.22 35.33,79.22 34.71,78.59 34.35,78.59 33.81,79.13 33.45,79.13 31.38,77.07 31.38,76.71 32.91,75.18 32.91,75 32.37,74.47 32.28,74.47
  Top 0.254: D14.A 25.82,76.89
  Top 0.406: 29.68,74.28 26,70.6 26,70.42 27.07,69.34 27.07,69.17 26.62,68.72 26.35,68.72 U15.1 | JP9.4 25.82,76.89 27.07,75.63 27.07,75.09 27.87,74.29 C23.1 28.6,75 28.96,75 29.68,74.28 | D15.C 30.3,73.66 | 30.3,73.66 29.68,74.28 | U13.4 32.28,74.47 32.28,74.37 31.92,74.02 31.74,74.02 31.56,74.19 30.84,74.19 30.3,73.66
5V5
  Top 0.203: 82.08,78.45 S11.1 81.37,79.22 81.05,79.22 80.43,78.59 80.07,78.59 79.53,79.13 79.17,79.13 77.1,77.07 77.1,76.71 78.63,75.18 78.63,75 78.09,74.47 78,74.47
  Top 0.254: D17.A 71.53,76.89
  Top 0.406: 75.4,74.28 71.72,70.6 71.72,70.42 72.79,69.34 72.79,69.17 72.34,68.72 72.07,68.72 U18.1 | JP11.4 71.53,76.89 72.79,75.63 72.79,75.09 73.59,74.29 C28.1 74.32,75 74.68,75 75.4,74.28 | D18.C 76.03,73.66 | 76.03,73.66 75.4,74.28 | U16.4 78,74.47 78,74.37 77.64,74.02 77.46,74.02 77.28,74.19 76.56,74.19 76.03,73.66
5V6
  Top 0.203: 127.8,78.45 S13.1 127.09,79.22 126.77,79.22 126.15,78.59 125.79,78.59 125.25,79.13 124.89,79.13 122.82,77.07 122.82,76.71 124.35,75.18 124.35,75 123.81,74.47 123.72,74.47
  Top 0.254: D20.A 117.25,76.89
  Top 0.406: 121.12,74.28 117.44,70.6 117.44,70.42 118.51,69.34 118.51,69.17 118.06,68.72 117.79,68.72 U21.1 | JP13.4 117.25,76.89 118.51,75.63 118.51,75.09 119.31,74.29 C33.1 120.04,75 120.4,75 121.12,74.28 | D21.C 121.75,73.66 | 121.75,73.66 121.12,74.28 | U19.4 123.72,74.47 123.72,74.37 123.36,74.02 123.18,74.02 123,74.19 122.28,74.19 121.75,73.66
5V7
  Top 0.203: 173.52,78.45 S15.1 172.81,79.22 172.49,79.22 171.87,78.59 171.51,78.59 170.97,79.13 170.61,79.13 168.54,77.07 168.54,76.71 170.07,75.18 170.07,75 169.53,74.47 169.44,74.47
  Top 0.254: D23.A 162.97,76.89
  Top 0.406: 166.84,74.28 163.16,70.6 163.16,70.42 164.23,69.34 164.23,69.17 163.78,68.72 163.51,68.72 U24.1 | JP15.4 162.97,76.89 164.23,75.63 164.23,75.09 165.03,74.29 C38.1 165.76,75 166.12,75 166.84,74.28 | D24.C 167.47,73.66 | 167.47,73.66 166.84,74.28 | U22.4 169.44,74.47 169.44,74.37 169.08,74.02 168.9,74.02 168.72,74.19 168,74.19 167.47,73.66
D1
  Top 0.203: U5.22 68.39,20.87 68.39,22.28 68.03,22.64 68.03,23.36 69.83,25.15 69.83,25.51 69.29,26.05 69.29,27.67 64.62,32.34 63.9,32.34 61.66,30.09 61.66,28.47 60.04,26.86 59.5,26.86 A5/1.1
D2
  Top 0.203: U5.21 68.84,20.62 68.84,21.65 69.2,22.01 69.2,22.19 68.57,22.82 68.57,23.18 70.55,25.15 70.55,25.51 69.83,26.23 69.83,27.31 70.1,27.58 70.1,27.76 64.17,33.68 64.17,35.66 63.36,36.47 61.39,36.47 U$6.1
D3
  Top 0.203: U3.22 22.67,20.87 22.67,22.28 22.31,22.64 22.31,23.36 24.11,25.15 24.11,25.51 23.57,26.05 23.57,27.67 18.9,32.34 18.18,32.34 15.94,30.09 15.94,28.47 14.32,26.86 13.78,26.86 A5/19.1
D4  (via drill 0.38)
  Top 0.203: U5.18 68.74,17.25 69.11,17.25 70.28,18.42 70.28,18.6 69.74,19.14 69.74,19.67 v70.1,20.03
  Bottom 0.203: v70.1,20.03 70.64,20.57 71,20.57 71.44,20.12 71.98,20.12 72.16,19.94 74.68,19.94 77.19,17.43 77.55,17.43 84.29,24.16 84.29,24.52 83.93,24.88 83.93,25.96 88.15,30.18 88.15,32.34 87.61,32.88 87.61,35.21 80.34,42.48 79.98,42.48 79.26,41.77 79.08,41.77 77.19,43.65 U$10.1
D5
  Top 0.203: U3.21 23.12,20.62 23.12,21.65 23.48,22.01 23.48,22.19 22.85,22.82 22.85,23.18 24.83,25.15 24.83,25.51 24.11,26.23 24.11,27.31 24.38,27.58 24.38,27.76 18.45,33.68 18.45,35.66 17.64,36.47 15.67,36.47 U$39.1
D6  (via drill 0.38)
  Top 0.203: U3.31 17.18,23.09 17.02,23.09 16.3,22.37 16.12,22.37 v15.67,22.82
  Bottom 0.203: v15.67,22.82 15.04,23.45 15.04,30.99 18.45,34.4 18.45,35.3 17.19,36.56 17.19,37.99 22.4,43.2 A4/18.1
D7  (via drill 0.38)
  Top 0.203: U5.17 68.48,16.8 69.38,16.8 70.91,18.33 v70.91,19.23 70.91,18.87
  Bottom 0.203: v70.91,19.23 71.36,19.67 71.72,19.67 72.25,19.14 72.79,19.14 73.06,19.4 74.5,19.4 77.19,16.71 77.55,16.71 85.01,24.16 85.01,24.52 84.56,24.97 84.56,25.87 88.69,30 88.69,32.52 88.15,33.05 88.15,35.39 85.01,38.53 85.01,39.25 U$9.1
D8  (via drill 0.38)
  Top 0.203: U5.16 68.85,15.72 69.02,15.72 71.62,18.33 v71.81,18.33
  Bottom 0.203: v71.81,18.33 72.7,18.33 73.15,18.78 74.05,18.78 77.01,15.81 77.37,15.81 85.54,23.98 85.54,24.7 85.09,25.15 85.09,25.51 89.23,29.64 89.23,31.8 U$5.1
D9  (via drill 0.38)
  Top 0.203: U3.18 23.02,17.25 23.39,17.25 24.56,18.42 24.56,18.6 24.02,19.14 24.02,19.67 v24.38,20.03
  Bottom 0.203: v24.38,20.03 24.92,20.57 25.28,20.57 25.73,20.12 26.26,20.12 26.44,19.94 28.96,19.94 31.47,17.43 31.83,17.43 38.57,24.16 38.57,24.52 38.21,24.88 38.21,25.96 42.43,30.18 42.43,32.34 41.89,32.88 41.89,35.21 34.62,42.48 34.26,42.48 33.54,41.77 33.36,41.77 31.47,43.65 U$4.1
D10  (via drill 0.38)
  Top 0.203: U5.15 68.68,15.18 69.2,15.18 71.44,17.43 v72.7,17.43 | v86.26,25.06 89.14,22.19 89.32,22.19 U$3.1
  Bottom 0.203: v72.7,17.43 73.42,18.15 73.78,18.15 76.92,15 77.28,15 86.26,23.98 v86.26,25.06
D11  (via drill 0.38)
  Top 0.203: U3.17 22.76,16.8 23.66,16.8 25.19,18.33 v25.19,19.23 25.19,18.87
  Bottom 0.203: v25.19,19.23 25.64,19.67 26,19.67 26.53,19.14 27.07,19.14 27.34,19.4 28.78,19.4 31.47,16.71 31.83,16.71 39.29,24.16 39.29,24.52 38.84,24.97 38.84,25.87 42.97,30 42.97,32.52 42.43,33.05 42.43,35.39 39.29,38.53 39.29,39.25 U$45.1
D12  (via drill 0.38)
  Top 0.203: U3.16 23.13,15.72 23.3,15.72 25.91,18.33 v26.09,18.33
  Bottom 0.203: v26.09,18.33 26.98,18.33 27.43,18.78 28.33,18.78 31.29,15.81 31.65,15.81 39.82,23.98 39.82,24.7 39.38,25.15 39.38,25.51 43.51,29.64 43.51,31.8 U$37.1
D13  (via drill 0.38)
  Top 0.203: U5.31 62.9,23.09 62.73,23.09 62.02,22.37 61.84,22.37 v61.39,22.82
  Bottom 0.203: v61.39,22.82 60.76,23.45 60.76,30.99 64.17,34.4 64.17,35.3 62.91,36.56 62.91,37.99 68.12,43.2 A4/1.1
D14
  Top 0.203: U8.22 114.11,20.87 114.11,22.28 113.75,22.64 113.75,23.36 115.55,25.15 115.55,25.51 115.01,26.05 115.01,27.67 110.34,32.34 109.62,32.34 107.38,30.09 107.38,28.47 105.76,26.86 105.22,26.86 A5/2.1
D15  (via drill 0.38)
  Top 0.203: U3.15 22.96,15.18 23.48,15.18 25.73,17.43 v26.98,17.43 | v40.54,25.06 43.42,22.19 43.6,22.19 U$35.1
  Bottom 0.203: v26.98,17.43 27.7,18.15 28.06,18.15 31.2,15 31.56,15 40.54,23.98 v40.54,25.06
D16
  Top 0.203: U8.21 114.56,20.62 114.56,21.65 114.92,22.01 114.92,22.19 114.29,22.82 114.29,23.18 116.27,25.15 116.27,25.51 115.55,26.23 115.55,27.31 115.82,27.58 115.82,27.76 109.89,33.68 109.89,35.66 109.08,36.47 107.11,36.47 U$15.1
D17  (via drill 0.38)
  Top 0.203: U8.18 114.46,17.25 114.83,17.25 116,18.42 116,18.6 115.46,19.14 115.46,19.67 v115.82,20.03
  Bottom 0.203: v115.82,20.03 116.36,20.57 116.72,20.57 117.17,20.12 117.7,20.12 117.88,19.94 120.4,19.94 122.91,17.43 123.27,17.43 130.01,24.16 130.01,24.52 129.65,24.88 129.65,25.96 133.87,30.18 133.87,32.34 133.33,32.88 133.33,35.21 126.06,42.48 125.7,42.48 124.98,41.77 124.8,41.77 122.91,43.65 U$19.1
D18  (via drill 0.38)
  Top 0.203: U8.17 114.2,16.8 115.1,16.8 116.63,18.33 v116.63,19.23 116.63,18.87
  Bottom 0.203: v116.63,19.23 117.08,19.67 117.44,19.67 117.97,19.14 118.51,19.14 118.78,19.4 120.22,19.4 122.91,16.71 123.27,16.71 130.73,24.16 130.73,24.52 130.28,24.97 130.28,25.87 134.41,30 134.41,32.52 133.87,33.05 133.87,35.39 130.73,38.53 130.73,39.25 U$18.1
D19  (via drill 0.38)
  Top 0.203: U8.16 114.57,15.72 114.74,15.72 117.34,18.33 v117.53,18.33
  Bottom 0.203: v117.53,18.33 118.42,18.33 118.87,18.78 119.77,18.78 122.73,15.81 123.09,15.81 131.26,23.98 131.26,24.7 130.81,25.15 130.81,25.51 134.95,29.64 134.95,31.8 U$14.1
D20  (via drill 0.38)
  Top 0.203: U8.15 114.4,15.18 114.92,15.18 117.17,17.43 v118.42,17.43 | v131.98,25.06 134.86,22.19 135.04,22.19 U$13.1
  Bottom 0.203: v118.42,17.43 119.14,18.15 119.5,18.15 122.64,15 123,15 131.98,23.98 v131.98,25.06
D21  (via drill 0.38)
  Top 0.203: U8.31 108.62,23.09 108.45,23.09 107.74,22.37 107.56,22.37 v107.11,22.82
  Bottom 0.203: v107.11,22.82 106.48,23.45 106.48,30.99 109.89,34.4 109.89,35.3 108.63,36.56 108.63,37.99 113.84,43.2 A4/2.1
D22
  Top 0.203: U11.22 159.83,20.87 159.83,22.28 159.47,22.64 159.47,23.36 161.27,25.15 161.27,25.51 160.73,26.05 160.73,27.67 156.06,32.34 155.34,32.34 153.1,30.09 153.1,28.47 151.48,26.86 150.94,26.86 A5/3.1
D23
  Top 0.203: U11.21 160.28,20.62 160.28,21.65 160.64,22.01 160.64,22.19 160.01,22.82 160.01,23.18 161.99,25.15 161.99,25.51 161.27,26.23 161.27,27.31 161.54,27.58 161.54,27.76 155.61,33.68 155.61,35.66 154.8,36.47 152.83,36.47 U$24.1
D24  (via drill 0.38)
  Top 0.203: U11.18 160.18,17.25 160.55,17.25 161.72,18.42 161.72,18.6 161.18,19.14 161.18,19.67 v161.54,20.03
  Bottom 0.203: v161.54,20.03 162.08,20.57 162.44,20.57 162.88,20.12 163.42,20.12 163.6,19.94 166.12,19.94 168.63,17.43 168.99,17.43 175.73,24.16 175.73,24.52 175.37,24.88 175.37,25.96 179.59,30.18 179.59,32.34 179.05,32.88 179.05,35.21 171.78,42.48 171.42,42.48 170.7,41.77 170.52,41.77 168.63,43.65 U$28.1
D25  (via drill 0.38)
  Top 0.203: U11.17 159.92,16.8 160.82,16.8 162.35,18.33 v162.35,19.23 162.35,18.87
  Bottom 0.203: v162.35,19.23 162.8,19.67 163.16,19.67 163.69,19.14 164.23,19.14 164.5,19.4 165.94,19.4 168.63,16.71 168.99,16.71 176.45,24.16 176.45,24.52 176,24.97 176,25.87 180.13,30 180.13,32.52 179.59,33.05 179.59,35.39 176.45,38.53 176.45,39.25 U$27.1
D26  (via drill 0.38)
  Top 0.203: U11.16 160.29,15.72 160.46,15.72 163.06,18.33 v163.25,18.33
  Bottom 0.203: v163.25,18.33 164.14,18.33 164.59,18.78 165.49,18.78 168.45,15.81 168.81,15.81 176.98,23.98 176.98,24.7 176.53,25.15 176.53,25.51 180.67,29.64 180.67,31.8 U$23.1
D27  (via drill 0.38)
  Top 0.203: U11.15 160.12,15.18 160.64,15.18 162.88,17.43 v164.14,17.43 | v177.7,25.06 180.58,22.19 180.76,22.19 U$22.1
  Bottom 0.203: v164.14,17.43 164.86,18.15 165.22,18.15 168.36,15 168.72,15 177.7,23.98 v177.7,25.06
D28  (via drill 0.38)
  Top 0.203: U11.31 154.34,23.09 154.18,23.09 153.46,22.37 153.28,22.37 v152.83,22.82
  Bottom 0.203: v152.83,22.82 152.2,23.45 152.2,30.99 155.61,34.4 155.61,35.3 154.35,36.56 154.35,37.99 159.56,43.2 A4/3.1
D29
  Top 0.203: U14.22 22.67,66.59 22.67,68 22.31,68.36 22.31,69.08 24.11,70.87 24.11,71.23 23.57,71.77 23.57,73.39 18.9,78.06 18.18,78.06 15.94,75.81 15.94,74.19 14.32,72.58 13.78,72.58 A5/4.1
D30
  Top 0.203: U14.21 23.12,66.34 23.12,67.37 23.48,67.73 23.48,67.91 22.85,68.54 22.85,68.9 24.83,70.87 24.83,71.23 24.11,71.95 24.11,73.03 24.38,73.3 24.38,73.48 18.45,79.4 18.45,81.38 17.64,82.19 15.67,82.19 U$33.1
D31  (via drill 0.38)
  Top 0.203: U14.18 23.02,62.97 23.39,62.97 24.56,64.14 24.56,64.32 24.02,64.86 24.02,65.39 v24.38,65.75
  Bottom 0.203: v24.38,65.75 24.92,66.29 25.28,66.29 25.73,65.84 26.26,65.84 26.44,65.66 28.96,65.66 31.47,63.15 31.83,63.15 38.57,69.88 38.57,70.24 38.21,70.6 38.21,71.68 42.43,75.9 42.43,78.06 41.89,78.59 41.89,80.93 34.62,88.2 34.26,88.2 33.54,87.48 33.36,87.48 31.47,89.37 U$40.1
D32  (via drill 0.38)
  Top 0.203: U14.17 22.76,62.52 23.66,62.52 25.19,64.05 v25.19,64.94 25.19,64.59
  Bottom 0.203: v25.19,64.94 25.64,65.39 26,65.39 26.53,64.86 27.07,64.86 27.34,65.12 28.78,65.12 31.47,62.43 31.83,62.43 39.29,69.88 39.29,70.24 38.84,70.69 38.84,71.59 42.97,75.72 42.97,78.24 42.43,78.77 42.43,81.11 39.29,84.25 39.29,84.97 U$38.1
D33  (via drill 0.38)
  Top 0.203: U14.16 23.13,61.44 23.3,61.44 25.91,64.05 v26.09,64.05
  Bottom 0.203: v26.09,64.05 26.98,64.05 27.43,64.5 28.33,64.5 31.29,61.53 31.65,61.53 39.82,69.7 39.82,70.42 39.38,70.87 39.38,71.23 43.51,75.36 43.51,77.52 U$32.1
D34  (via drill 0.38)
  Top 0.203: U14.15 22.96,60.9 23.48,60.9 25.73,63.15 v26.98,63.15 | v40.54,70.78 43.42,67.91 43.6,67.91 U$31.1
  Bottom 0.203: v26.98,63.15 27.7,63.87 28.06,63.87 31.2,60.72 31.56,60.72 40.54,69.7 v40.54,70.78
D35  (via drill 0.38)
  Top 0.203: U14.31 17.18,68.81 17.02,68.81 16.3,68.09 16.12,68.09 v15.67,68.54
  Bottom 0.203: v15.67,68.54 15.04,69.17 15.04,76.71 18.45,80.12 18.45,81.02 17.19,82.28 17.19,83.71 22.4,88.92 A4/4.1
D36
  Top 0.203: U17.22 68.39,66.59 68.39,68 68.03,68.36 68.03,69.08 69.83,70.87 69.83,71.23 69.29,71.77 69.29,73.39 64.62,78.06 63.9,78.06 61.66,75.81 61.66,74.19 60.04,72.58 59.5,72.58 A5/5.1
D37
  Top 0.203: U17.21 68.84,66.34 68.84,67.37 69.2,67.73 69.2,67.91 68.57,68.54 68.57,68.9 70.55,70.87 70.55,71.23 69.83,71.95 69.83,73.03 70.1,73.3 70.1,73.48 64.17,79.4 64.17,81.38 63.36,82.19 61.39,82.19 U$48.1
D38  (via drill 0.38)
  Top 0.203: U17.18 68.74,62.97 69.11,62.97 70.28,64.14 70.28,64.32 69.74,64.86 69.74,65.39 v70.1,65.75
  Bottom 0.203: v70.1,65.75 70.64,66.29 71,66.29 71.44,65.84 71.98,65.84 72.16,65.66 74.68,65.66 77.19,63.15 77.55,63.15 84.29,69.88 84.29,70.24 83.93,70.6 83.93,71.68 88.15,75.9 88.15,78.06 87.61,78.59 87.61,80.93 80.34,88.2 79.98,88.2 79.26,87.48 79.08,87.48 77.19,89.37 U$52.1
D39  (via drill 0.38)
  Top 0.203: U17.17 68.48,62.52 69.38,62.52 70.91,64.05 v70.91,64.94 70.91,64.59
  Bottom 0.203: v70.91,64.94 71.36,65.39 71.72,65.39 72.25,64.86 72.79,64.86 73.06,65.12 74.5,65.12 77.19,62.43 77.55,62.43 85.01,69.88 85.01,70.24 84.56,70.69 84.56,71.59 88.69,75.72 88.69,78.24 88.15,78.77 88.15,81.11 85.01,84.25 85.01,84.97 U$51.1
D40  (via drill 0.38)
  Top 0.203: U17.16 68.85,61.44 69.02,61.44 71.62,64.05 v71.81,64.05
  Bottom 0.203: v71.81,64.05 72.7,64.05 73.15,64.5 74.05,64.5 77.01,61.53 77.37,61.53 85.54,69.7 85.54,70.42 85.09,70.87 85.09,71.23 89.23,75.36 89.23,77.52 U$47.1
D41  (via drill 0.38)
  Top 0.203: U17.15 68.68,60.9 69.2,60.9 71.44,63.15 v72.7,63.15 | v86.26,70.78 89.14,67.91 89.32,67.91 U$46.1
  Bottom 0.203: v72.7,63.15 73.42,63.87 73.78,63.87 76.92,60.72 77.28,60.72 86.26,69.7 v86.26,70.78
D42  (via drill 0.38)
  Top 0.203: U17.31 62.9,68.81 62.73,68.81 62.02,68.09 61.84,68.09 v61.39,68.54
  Bottom 0.203: v61.39,68.54 60.76,69.17 60.76,76.71 64.17,80.12 64.17,81.02 62.91,82.28 62.91,83.71 68.12,88.92 A4/5.1
D43
  Top 0.203: U20.22 114.11,66.59 114.11,68 113.75,68.36 113.75,69.08 115.55,70.87 115.55,71.23 115.01,71.77 115.01,73.39 110.34,78.06 109.62,78.06 107.38,75.81 107.38,74.19 105.76,72.58 105.22,72.58 A5/6.1
D44
  Top 0.203: U20.21 114.56,66.34 114.56,67.37 114.92,67.73 114.92,67.91 114.29,68.54 114.29,68.9 116.27,70.87 116.27,71.23 115.55,71.95 115.55,73.03 115.82,73.3 115.82,73.48 109.89,79.4 109.89,81.38 109.08,82.19 107.11,82.19 U$57.1
D45  (via drill 0.38)
  Top 0.203: U20.18 114.46,62.97 114.83,62.97 116,64.14 116,64.32 115.46,64.86 115.46,65.39 v115.82,65.75
  Bottom 0.203: v115.82,65.75 116.36,66.29 116.72,66.29 117.17,65.84 117.7,65.84 117.88,65.66 120.4,65.66 122.91,63.15 123.27,63.15 130.01,69.88 130.01,70.24 129.65,70.6 129.65,71.68 133.87,75.9 133.87,78.06 133.33,78.59 133.33,80.93 126.06,88.2 125.7,88.2 124.98,87.48 124.8,87.48 122.91,89.37 U$61.1
D46  (via drill 0.38)
  Top 0.203: U20.17 114.2,62.52 115.1,62.52 116.63,64.05 v116.63,64.94 116.63,64.59
  Bottom 0.203: v116.63,64.94 117.08,65.39 117.44,65.39 117.97,64.86 118.51,64.86 118.78,65.12 120.22,65.12 122.91,62.43 123.27,62.43 130.73,69.88 130.73,70.24 130.28,70.69 130.28,71.59 134.41,75.72 134.41,78.24 133.87,78.77 133.87,81.11 130.73,84.25 130.73,84.97 U$60.1
D47  (via drill 0.38)
  Top 0.203: U20.16 114.57,61.44 114.74,61.44 117.34,64.05 v117.53,64.05
  Bottom 0.203: v117.53,64.05 118.42,64.05 118.87,64.5 119.77,64.5 122.73,61.53 123.09,61.53 131.26,69.7 131.26,70.42 130.81,70.87 130.81,71.23 134.95,75.36 134.95,77.52 U$56.1
D48  (via drill 0.38)
  Top 0.203: U20.15 114.4,60.9 114.92,60.9 117.17,63.15 v118.42,63.15 | v131.98,70.78 134.86,67.91 135.04,67.91 U$55.1
  Bottom 0.203: v118.42,63.15 119.14,63.87 119.5,63.87 122.64,60.72 123,60.72 131.98,69.7 v131.98,70.78
D49  (via drill 0.38)
  Top 0.203: U20.31 108.62,68.81 108.45,68.81 107.74,68.09 107.56,68.09 v107.11,68.54
  Bottom 0.203: v107.11,68.54 106.48,69.17 106.48,76.71 109.89,80.12 109.89,81.02 108.63,82.28 108.63,83.71 113.84,88.92 A4/6.1
D50
  Top 0.203: U23.22 159.83,66.59 159.83,68 159.47,68.36 159.47,69.08 161.27,70.87 161.27,71.23 160.73,71.77 160.73,73.39 156.06,78.06 155.34,78.06 153.1,75.81 153.1,74.19 151.48,72.58 150.94,72.58 A5/7.1
D51
  Top 0.203: U23.21 160.28,66.34 160.28,67.37 160.64,67.73 160.64,67.91 160.01,68.54 160.01,68.9 161.99,70.87 161.99,71.23 161.27,71.95 161.27,73.03 161.54,73.3 161.54,73.48 155.61,79.4 155.61,81.38 154.8,82.19 152.83,82.19 U$66.1
D52  (via drill 0.38)
  Top 0.203: U23.18 160.18,62.97 160.55,62.97 161.72,64.14 161.72,64.32 161.18,64.86 161.18,65.39 v161.54,65.75
  Bottom 0.203: v161.54,65.75 162.08,66.29 162.44,66.29 162.88,65.84 163.42,65.84 163.6,65.66 166.12,65.66 168.63,63.15 168.99,63.15 175.73,69.88 175.73,70.24 175.37,70.6 175.37,71.68 179.59,75.9 179.59,78.06 179.05,78.59 179.05,80.93 171.78,88.2 171.42,88.2 170.7,87.48 170.52,87.48 168.63,89.37 U$70.1
D53  (via drill 0.38)
  Top 0.203: U23.17 159.92,62.52 160.82,62.52 162.35,64.05 v162.35,64.94 162.35,64.59
  Bottom 0.203: v162.35,64.94 162.8,65.39 163.16,65.39 163.69,64.86 164.23,64.86 164.5,65.12 165.94,65.12 168.63,62.43 168.99,62.43 176.45,69.88 176.45,70.24 176,70.69 176,71.59 180.13,75.72 180.13,78.24 179.59,78.77 179.59,81.11 176.45,84.25 176.45,84.97 U$69.1
D54  (via drill 0.38)
  Top 0.203: U23.16 160.29,61.44 160.46,61.44 163.06,64.05 v163.25,64.05
  Bottom 0.203: v163.25,64.05 164.14,64.05 164.59,64.5 165.49,64.5 168.45,61.53 168.81,61.53 176.98,69.7 176.98,70.42 176.53,70.87 176.53,71.23 180.67,75.36 180.67,77.52 U$65.1
D55  (via drill 0.38)
  Top 0.203: U23.15 160.12,60.9 160.64,60.9 162.88,63.15 v164.14,63.15 | v177.7,70.78 180.58,67.91 180.76,67.91 U$64.1
  Bottom 0.203: v164.14,63.15 164.86,63.87 165.22,63.87 168.36,60.72 168.72,60.72 177.7,69.7 v177.7,70.78
D56  (via drill 0.38)
  Top 0.203: U23.31 154.34,68.81 154.18,68.81 153.46,68.09 153.28,68.09 v152.83,68.54
  Bottom 0.203: v152.83,68.54 152.2,69.17 152.2,76.71 155.61,80.12 155.61,81.02 154.35,82.28 154.35,83.71 159.56,88.92 A4/7.1
DTR  (via drill 0.38)
  Top 0.203: R5.1 18.27,28.6 18.27,29.01 v18.63,29.37 | JP2.1 v28.51,39.25
  Bottom 0.203: v18.63,29.37 17.91,30.09 17.91,30.45 27.43,39.97 27.79,39.97 v28.51,39.25
DTR1  (via drill 0.38)
  Top 0.203: R12.1 63.99,28.6 63.99,29.01 v64.35,29.37 | JP3.1 v74.23,39.25
  Bottom 0.203: v64.35,29.37 63.63,30.09 63.63,30.45 73.15,39.97 73.51,39.97 v74.23,39.25
DTR2  (via drill 0.38)
  Top 0.203: R18.1 109.71,28.6 109.71,29.01 v110.07,29.37 | JP5.1 v119.95,39.25
  Bottom 0.203: v110.07,29.37 109.35,30.09 109.35,30.45 118.87,39.97 119.23,39.97 v119.95,39.25
DTR3  (via drill 0.38)
  Top 0.203: R24.1 155.43,28.6 155.43,29.01 v155.79,29.37 | JP7.1 v165.67,39.25
  Bottom 0.203: v155.79,29.37 155.07,30.09 155.07,30.45 164.59,39.97 164.95,39.97 v165.67,39.25
DTR4  (via drill 0.38)
  Top 0.203: R30.1 18.27,74.32 18.27,74.73 v18.63,75.09 | JP9.1 v28.51,84.97
  Bottom 0.203: v18.63,75.09 17.91,75.81 17.91,76.17 27.43,85.69 27.79,85.69 v28.51,84.97
DTR5  (via drill 0.38)
  Top 0.203: R36.1 63.99,74.32 63.99,74.73 v64.35,75.09 | JP11.1 v74.23,84.97
  Bottom 0.203: v64.35,75.09 63.63,75.81 63.63,76.17 73.15,85.69 73.51,85.69 v74.23,84.97
DTR6  (via drill 0.38)
  Top 0.203: R42.1 109.71,74.32 109.71,74.73 v110.07,75.09 | JP13.1 v119.95,84.97
  Bottom 0.203: v110.07,75.09 109.35,75.81 109.35,76.17 118.87,85.69 119.23,85.69 v119.95,84.97
DTR7  (via drill 0.38)
  Top 0.203: R48.1 155.43,74.32 155.43,74.73 v155.79,75.09 | JP15.1 v165.67,84.97
  Bottom 0.203: v155.79,75.09 155.07,75.81 155.07,76.17 164.59,85.69 164.95,85.69 v165.67,84.97
GND  (via drill 0.38)
  Top 0.203: U3.19 v23.39,18.69 | 19.17,23.62 v18.99,23.62 v18.98,23.62 U3.30 | v19.44,30.36 JP2.6 20.79,29.01 20.79,28.47 19.53,27.22 19.53,27.05 D2.C | JP2.5 v21.23,32.16 | v19.71,18.42 v19.72,18.42 U3.43 U3.42 U3.45 U3.44 v18.37,19.76 v18.36,19.76 | S3.1 v38.39,31.17 | R2.2 33.95,27.22 34.08,27.22 34.44,27.58 v34.8,27.58 | C1.2 19.71,12.49 19.29,12.49 U3.6
  Top 0.254: S2.3 33.67,35.48 v33.72,35.48 | C1.2 20.75,12.4 v21.59,12.4
  Top 0.406: C9.2 v25.82,26.5 | C10.2 v28.87,23.45 | U1.2 v25.82,22.19 27.52,20.48 27.52,20.3 26.71,19.49 26.71,19.14 27.34,18.51 27.52,18.51 C2.2 | U2.2 v29.41,32.97 | 35.69,24.73 JP1.1 35.58,24.64 v35.51,24.7
  Bottom 0.254: v21.59,12.4 22.67,13.48 23.39,13.48 24.65,14.73 24.65,14.91